# EAGLE board coil-control-module-v3 (EAGLE 7.1.0)
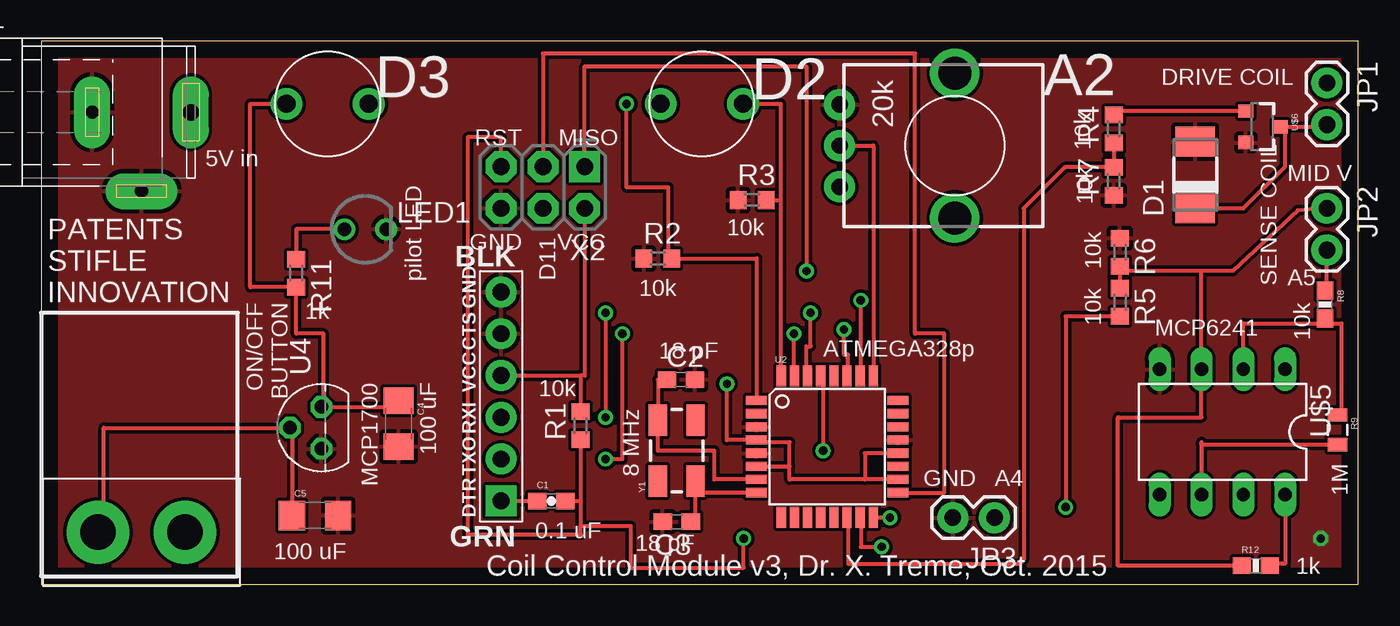
[diagram p0: board, top side]
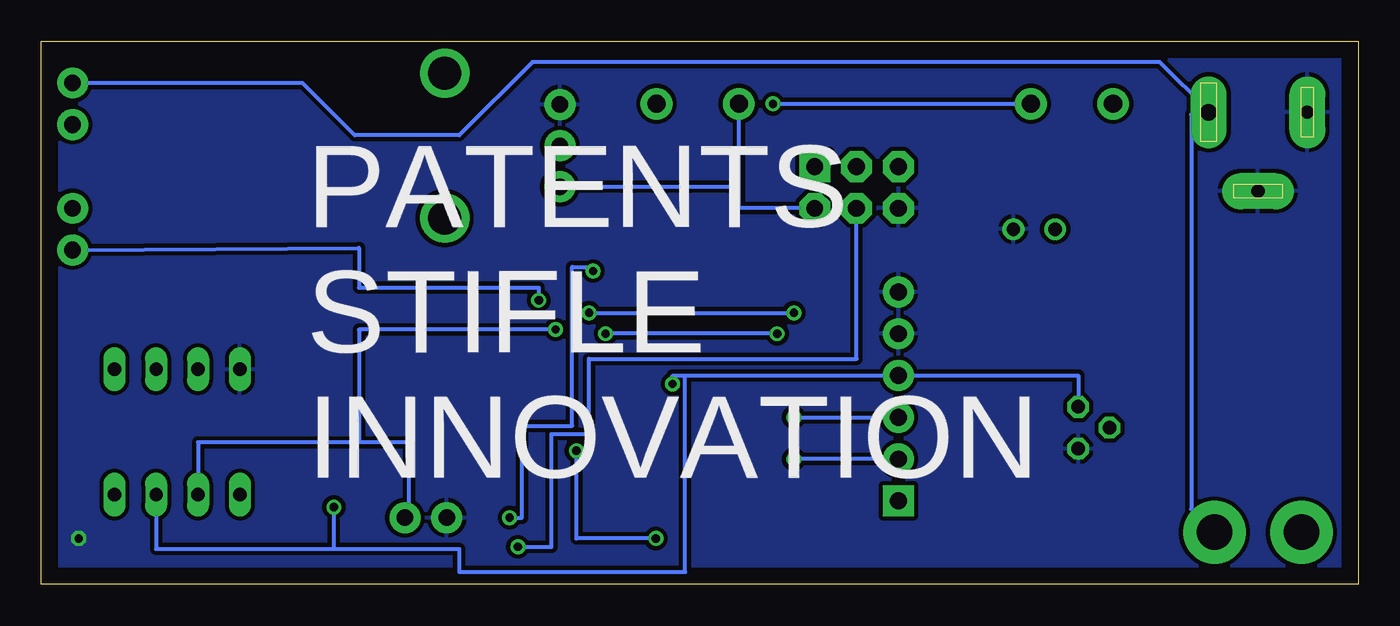
[diagram p1: board, bottom side, seen from below]

Size 80.01 x 33.02 mm. Coordinates in mm from the lower left corner, seen from the top.
Outline: 0,0 80.01,0 80.01,33.02 0,33.02 0,0
Copper layers (1*16): Top 0.035mm / dielectric 1.5mm / Bottom 0.035mm
Design rules "default": minimum track width 10mil, minimum drill 24mil, track to track 8mil, track to pad 8mil, pad to pad 8mil, via to via 8mil, smd to smd 8mil, copper to edge 40mil, drill to drill 8mil, minimum pad ring 10mil, minimum via ring 8mil, stop-mask expansion 4mil, vias tented up to drill 0mil, thermal gap 10mil
Net classes: 0 default: width 0.203 mm; 1 vcc: width 0.254 mm

## Footprints (pad centres in the part's own frame; a part is rotated, then mirrored left to right if it is on the bottom)
0603-CAP = smd 1.1 x 1: 1 -0.85,0; 2 0.85,0
C0603 = smd 1.1 x 1: 1 -0.85,0; 2 0.85,0
1206 = smd 1.6 x 1.8: 1 -1.4,0; 2 1.4,0
DO-214AC = smd 1.8 x 2.4: A 2.025,0; C -2.025,0
SPC4078 = drill 0.8 pad 2.184 long: 1 -3,0; 2 0,-4.8 | drill 1 pad 2.184 long: 3 3,0
1X02 = drill 1.016 pad 1.88: 1 0,0; 2 2.54,0
LED3MM-NS = drill 0.813: A -1.27,0; K 1.27,0
R0603 = smd 1 x 1.1: 1 -0.85,0; 2 0.85,0
0603-RES = smd 1.1 x 1: 1 -0.85,0; 2 0.85,0
0805 = smd 0.8 x 1.2: 1 -0.9,0; 2 0.9,0
ALPS_POT_KIT = drill 1 pad 1.88: P$1 7,-2.5; P$2 7,0; P$3 7,2.5 | drill 2: P$4 0,-4.4; P$5 0,4.4
CW182-ND = drill 2.159 pad 3.81: P$1 -2.642,0; P$2 2.642,0
BUTTON = drill 1.1 pad 1.93: P$1 -2.499,0; P$2 2.499,0
TQFP32-08 = smd 1.27 x 0.559: 1 -4.293,2.8; 2 -4.293,2; 3 -4.293,1.2; 4 -4.293,0.4; 5 -4.293,-0.4; 6 -4.293,-1.2; 7 -4.293,-2; 8 -4.293,-2.8; 17 4.293,-2.8; 18 4.293,-2; 19 4.293,-1.2; 20 4.293,-0.4; 21 4.293,0.4; 22 4.293,1.2; 23 4.293,2; 24 4.293,2.8 | smd 0.559 x 1.27: 9 -2.8,-4.293; 10 -2,-4.293; 11 -1.2,-4.293; 12 -0.4,-4.293; 13 0.4,-4.293; 14 1.2,-4.293; 15 2,-4.293; 16 2.8,-4.293; 25 2.8,4.293; 26 2,4.293; 27 1.2,4.293; 28 0.4,4.293; 29 -0.4,4.293; 30 -1.2,4.293; 31 -2,4.293; 32 -2.8,4.293
TO92-3 = drill 0.813 octagon: 1 -1.27,0; 2 0,1.905; 3 1.27,0
DIP08 = drill 0.813 long: 1 -2.54,-3.81; 2 0,-3.81; 3 2.54,-3.81; 4 5.08,-3.81; 5 5.08,3.81; 6 2.54,3.81; 7 0,3.81; 8 -2.54,3.81
SOT-23 = smd 0.8 x 0.9: 1 -0.95,-1; 2 0.95,-1; 3 0,1.1
FTDI_DEVICE_SIDE = drill 1.016 pad 1.88 square: P$1 -6.35,0 | drill 1.016 pad 1.88: P$2 -3.81,0; P$3 -1.27,0; P$4 1.27,0; P$5 3.81,0; P$6 6.35,0
2X3-NS = drill 1.016 pad 1.88 square: 1 -2.54,-1.27 | drill 1.016 pad 1.88 octagon: 2 -2.54,1.27; 3 0,-1.27; 4 0,1.27; 5 2.54,-1.27; 6 2.54,1.27
CRYSTAL-SMD-5X3 = smd 1.9 x 1.1: 1 -1.85,-1.15; 2 1.85,-1.15; 3 1.85,1.15; 4 -1.85,1.15

## Placement (x,y rotation side)
C1  100 nF  [0603-CAP]  30.99,5.08 0 top
C2  18pF  [C0603]  38.86,12.45 0 top
C3  18pF  [C0603]  38.61,3.81 180 top
C4  100 uF  [1206]  21.72,9.78 270 top
C5  100 uF  [1206]  16.64,4.19 0 top
D1  [DO-214AC]  70.1,24.89 90 top
J1  [SPC4078]  6.1,28.7 0 top
JP1  [1X02]  78.11,30.48 270 top
JP2  [1X02]  78.11,22.86 270 top
JP3  [1X02]  57.91,4.06 180 top
LED1  [LED3MM-NS]  19.68,21.59 0 top
R1  10K  [R0603]  32.77,9.65 90 top
R2  10K  [R0603]  37.47,19.81 0 top
R3  10K  [R0603]  43.18,23.37 0 top
R4  10K  [R0603]  65.15,27.69 90 top
R5  10K  [R0603]  65.53,17.14 270 top
R6  10K  [R0603]  65.53,20.19 270 top
R7  10K  [R0603]  65.15,24.51 90 top
R8  10k  [0603-RES]  77.98,17.02 270 top
R9  1M  [0805]  78.74,9.4 270 top
R10  20k  [ALPS_POT_KIT]  55.5,26.67 180 top
R11  3.3k  [R0603]  15.49,18.92 270 top
R12  1k  [0603-RES]  73.79,1.14 0 top
SW1  CW182-ND  [CW182-ND]  6.1,3.17 180 top
SW2  BUTTON  [BUTTON]  40.13,29.21 0 top
SW3  BUTTON  [BUTTON]  17.4,29.21 0 top
U2  ATMEGA328P  [TQFP32-08]  47.75,8.38 0 top
U4  MCP1700  [TO92-3]  17.02,9.53 90 top
U$5  LM4250  [DIP08]  73.03,9.27 180 top
U$6  IRLML0060  [SOT-23]  74.17,27.81 270 top
X1  FTDI_DEVICE  [FTDI_DEVICE_SIDE]  27.94,11.43 90 top
X2  [2X3-NS]  30.48,24.13 180 top
Y1  16 MHz  [CRYSTAL-SMD-5X3]  38.61,8.13 90 top

## Library data of the parts
C1 R9 = SparkFun-Passives
C2 C3 R1-R7 R11 = resistor
C4 C5 = SparkFun-Capacitors
D1 = diode
J1 = con-jack; OC_FARNELL: unknown; OC_NEWARK: unknown
JP1-JP3 X1 X2 = SparkFun-Connectors
LED1 = SparkFun-LED
R8 R12 = SparkFun-Resistors
R10 = SparkFun-Electromechanical
SW1-SW3 U4 U$5 U$6 = spietz-library
U2 = SparkFun-DigitalIC; PROD_ID: IC-09069
Y1 = SparkFun-FreqCtrl

## Nets
/RST: C1.2 R1.1 U2.29 X2.5
A2: R10.P$2 U2.25
A4: JP3.1 R9.2 U2.27 U$5.6
A5: U2.28
D2: R3.2 SW2.P$2 U2.32
D3: R2.2 SW3.P$2 U2.1
D5: U2.9
D6: U2.10
D9: U2.13
D10: R4.1 R7.2 U2.14
GND: C2.2 C3.2 C4.2 C5.2 D1.A J1.1 J1.2 JP3.2 LED1.K R2.1 R3.1 R6.1 R7.1 R10.P$1 U2.3 U2.5 U2.21 U4.1 U$5.4 U$6.2 X1.P$5 X1.P$6 X2.6
GRN: C1.1 X1.P$1
MIDV: JP2.1 R5.1 R6.2 R12.1 U$5.3
MISO: U2.16 X2.1
MOSI: U2.15 X2.4
N$3: D1.C JP1.2 U$6.3
N$4: C2.1 U2.7 Y1.3
N$10: LED1.A R11.1
N$11: C3.1 U2.8 Y1.1
N$14: R8.2 R9.1 U$5.2
N$16: R12.2 U$5.8
N$27: R4.2 U$6.1
RX: U2.30 X1.P$3
SCK: U2.17 X2.3
SENSECOIL: JP2.2 R8.1 U2.26
TX: U2.31 X1.P$2
VCC: C4.1 R1.2 R5.2 R10.P$3 R11.2 SW2.P$1 SW3.P$1 U2.4 U2.6 U2.18 U2.20 U4.3 U$5.7 X1.P$4 X2.2
VIN: C5.1 SW1.P$2 U4.2
VPOWER: J1.3 JP1.1 SW1.P$1

## Tracks (layer width: path | path; a pad name or v marks a point on that pad's centre or on a via)
/RST  (via drill 0.5)
  Top 0.254: C1.2 32.77,5.08 | U2.29 47.5,12.68 v47.5,8.13 | R1.1 32.77,5.08 | 32.77,5.08 32.77,3.56 | 32.77,3.56 35.81,3.56 35.81,1.02 42.67,1.02 v42.67,2.79 | X2.5 27.94,27.18 25.91,27.18 25.91,3.05 32.77,3.05 32.77,3.56
  Bottom 0.254: v42.67,2.79 47.5,2.79 v47.5,8.13
A2
  Top 0.254: R10.P$2 50.55,26.67 U2.25
A4  (via drill 0.5)
  Top 0.254: 70.48,8.55 U$5.6 70.48,8.5 | U2.27 49.02,12.68 49.02,13.97 48.77,13.97 v48.77,15.49 | R9.2 70.48,8.5 | 70.48,8.5 70.48,8.64
  Bottom 0.254: v48.77,15.49 60.71,15.49 60.71,8.64 | 60.71,8.64 70.48,8.64 U$5.6 | JP3.1 57.66,4.06 57.66,8.64 60.71,8.64
D2
  Top 0.254: U2.32 44.92,12.68 44.92,23.37 | SW2.P$2 44.92,29.21 44.92,23.37 | R3.2 44.92,23.37
D3  (via drill 0.5)
  Top 0.254: 43.39,11.18 U2.1 43.46,19.81 R2.2 38.1,19.81 38.1,24.13 35.56,24.13 v35.56,29.21
  Bottom 0.254: v35.56,29.21 SW3.P$2
D10
  Top 0.254: U2.14 49.02,4.09 49.02,1.27 59.44,1.27 59.69,1.52 59.69,22.86 62.19,25.36 R7.2 R4.1
GND  (via drill 0.5)
  other vias: 77.72,2.79
  pour Top (isolate 0.152): -1.27,49.91 -1.27,-1.27 99.57,-2.41 99.31,49.28
  pour Bottom (isolate 0.254): -2.54,50.8 -2.29,-2.79 100.33,-2.41 100.08,50.16
GRN
  Top 0.254: X1.P$1 C1.1
MIDV
  Top 0.254: R5.1 R6.2 65.83,19.05 70.48,19.05 | JP2.1 76.33,22.73 72.39,19.05 70.48,19.05 | 70.48,19.05 U$5.3 70.48,10.16 65.41,10.16 65.41,1.14 R12.1
MISO  (via drill 0.5)
  Top 0.254: X2.1 33.02,31.5 46.48,31.5 v46.48,19.05 | U2.16 51.56,4.09 v51.56,4.06
  Bottom 0.254: v51.56,4.06 50.8,4.06 50.8,9.65 47.75,9.65 47.75,19.3 46.48,19.3 v46.48,19.05
MOSI  (via drill 0.5)
  Top 0.254: U2.15 49.78,4.09 49.78,2.29 v51.05,2.29
  Bottom 0.254: v51.05,2.29 49.02,2.29 49.02,9.14 46.74,9.14 46.74,13.72 30.48,13.72 X2.4
N$3
  Top 0.254: JP1.2 77.98,27.81 U$6.3 75.56,27.52 75.56,25.4 73.03,22.87 D1.C
N$4
  Top 0.254: U2.7 40.89,6.38 40.89,8.13 37.46,8.13 Y1.3 37.46,12.45 C2.1
N$10
  Top 0.254: LED1.A 15.49,21.59 R11.1
N$11
  Top 0.254: U2.8 40.27,5.58 Y1.1 39.76,3.81 C3.1
N$14
  Top 0.254: U$5.2 73.03,15.88 77.98,15.88 | 77.98,15.88 R8.2 | 77.98,15.88 78.99,15.88 78.99,10.3 R9.1
N$16
  Top 0.254: U$5.8 75.56,1.27 74.64,1.27 R12.2
N$27
  Top 0.254: U$6.1 65.38,28.76 R4.2
RX  (via drill 0.5)
  Top 0.254: U2.30 46.48,12.68 46.48,14.48 46.74,14.48 v46.74,16.51 | v34.29,16.51 v34.29,10.16
  Bottom 0.254: v46.74,16.51 v34.29,16.51 | v34.29,10.16 X1.P$3
SCK
  Top 0.254: U2.17 54.86,5.58 54.86,15.24 53.09,15.24 53.09,32.26 30.48,32.26 X2.3
SENSECOIL  (via drill 0.5)
  Top 0.254: v49.78,17.27 49.75,17.27 U2.26 | R8.1 78.11,17.87 JP2.2
  Bottom 0.254: JP2.2 60.71,20.45 60.71,18.03 49.78,18.03 v49.78,17.27
TX  (via drill 0.5)
  Top 0.254: U2.31 45.72,12.68 v45.72,15.24 | v34.29,7.62 35.31,7.62 v35.31,15.24
  Bottom 0.254: X1.P$2 v34.29,7.62 | v35.31,15.24 v45.72,15.24
VCC  (via drill 0.5)
  Top 0.254: X1.P$4 32.77,12.7 | 32.77,12.7 R1.2 | U2.6 45.47,7.18 | 45.47,7.18 45.47,8.64 43.46,8.64 U2.4 41.66,8.78 v41.66,12.19 | U2.18 50.04,6.38 | 50.04,6.38 45.47,6.38 45.47,7.18 | U2.20 50.04,7.98 50.04,6.38 | X2.2 33.02,12.7 32.77,12.7 | C4.1 21.72,10.79 U4.3 17.14,10.79 17.14,15.24 15.49,15.24 R11.2 12.7,18.07 12.7,29.21 SW3.P$1 | R5.2 62.23,16.3 v62.23,4.7
  Bottom 0.254: X2.2 37.63,22.86 37.63,24.17 | 37.63,24.17 SW2.P$1 | R10.P$3 37.63,24.17 | v41.66,12.19 41.66,12.7 40.89,12.7 | 40.89,12.7 X1.P$4 17.02,12.7 U4.3 | 40.89,12.7 40.89,0.76 54.61,0.76 54.61,2.16 62.23,2.16 | U$5.7 73.03,2.16 62.23,2.16 | v62.23,4.7 62.23,2.16
VIN
  Top 0.254: SW1.P$2 3.81,3.17 3.81,9.53 U4.2 15.24,9.53 C5.1
VPOWER
  Bottom 0.254: JP1.1 64.14,30.48 60.96,27.3 54.61,27.3 50.16,31.75 12.06,31.75 9.1,28.78 J1.3 10.03,28.7 10.16,28.57 10.16,4.6 SW1.P$1

## Text on the board
tPlace: D3 | D2 | A2 | DRIVE COIL | 10k | RST | MISO | 5V in | MID V | 10k | pilot LED | 10k | GND | D11 | VCC | 10k | 10k | 10k | SENSE COIL | A5 | PATENTS / STIFLE / INNOVATION | ON/OFF / BUTTON | 1k | 10k | MCP6241 | 18 pF | ATMEGA328p | 10k | 8 MHz | 100 uF | 1M | MCP1700 | GND | A4 | 0.1 uF | 100 uF | 18 pF | Coil Control Module v3, Dr. X. Treme, Oct. 2015 | 1k
bPlace: PATENTS / STIFLE / INNOVATION